# Allegro board fulladd.brd
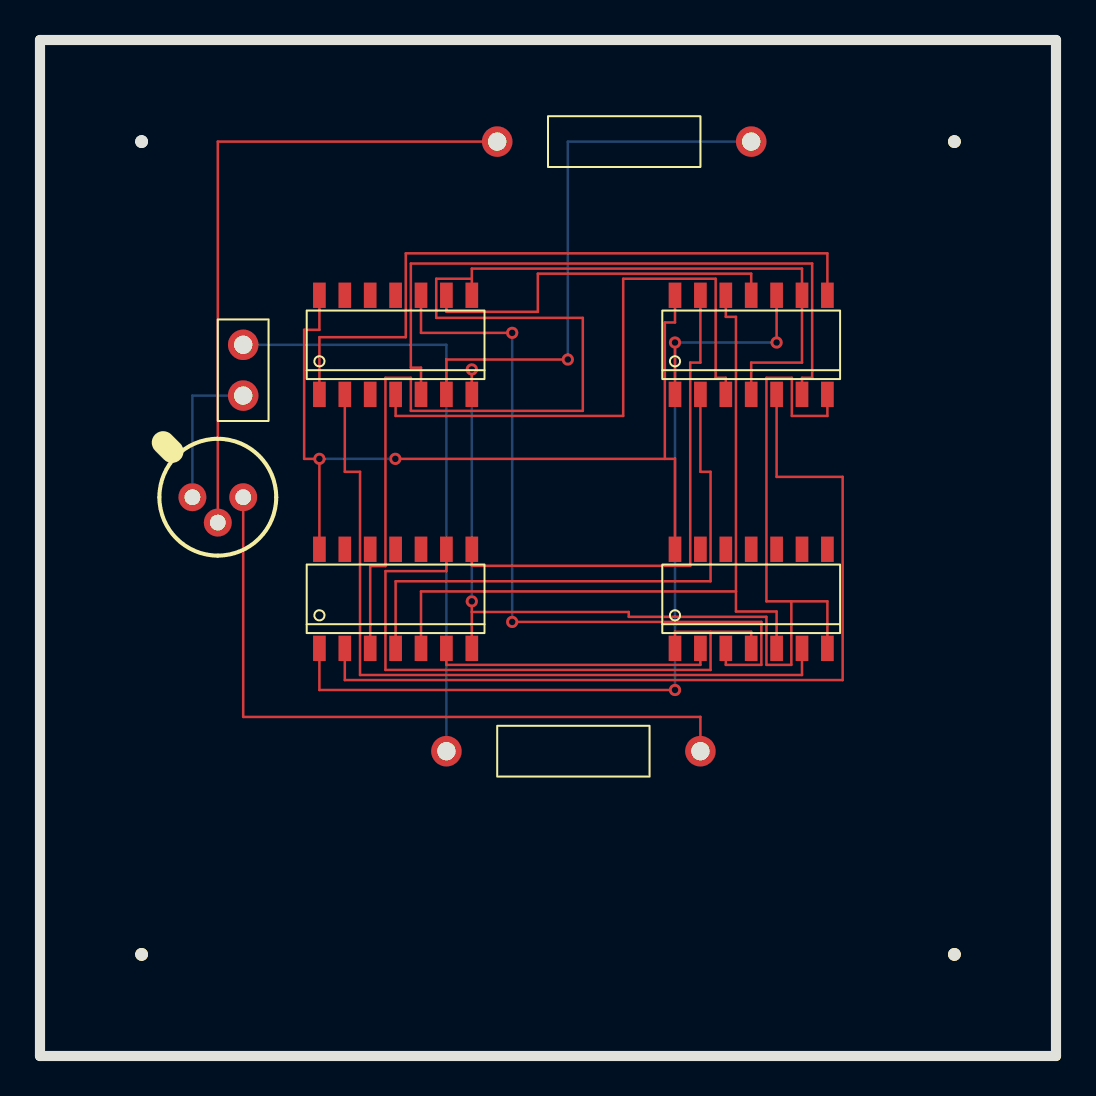
[diagram p0: board, top side]
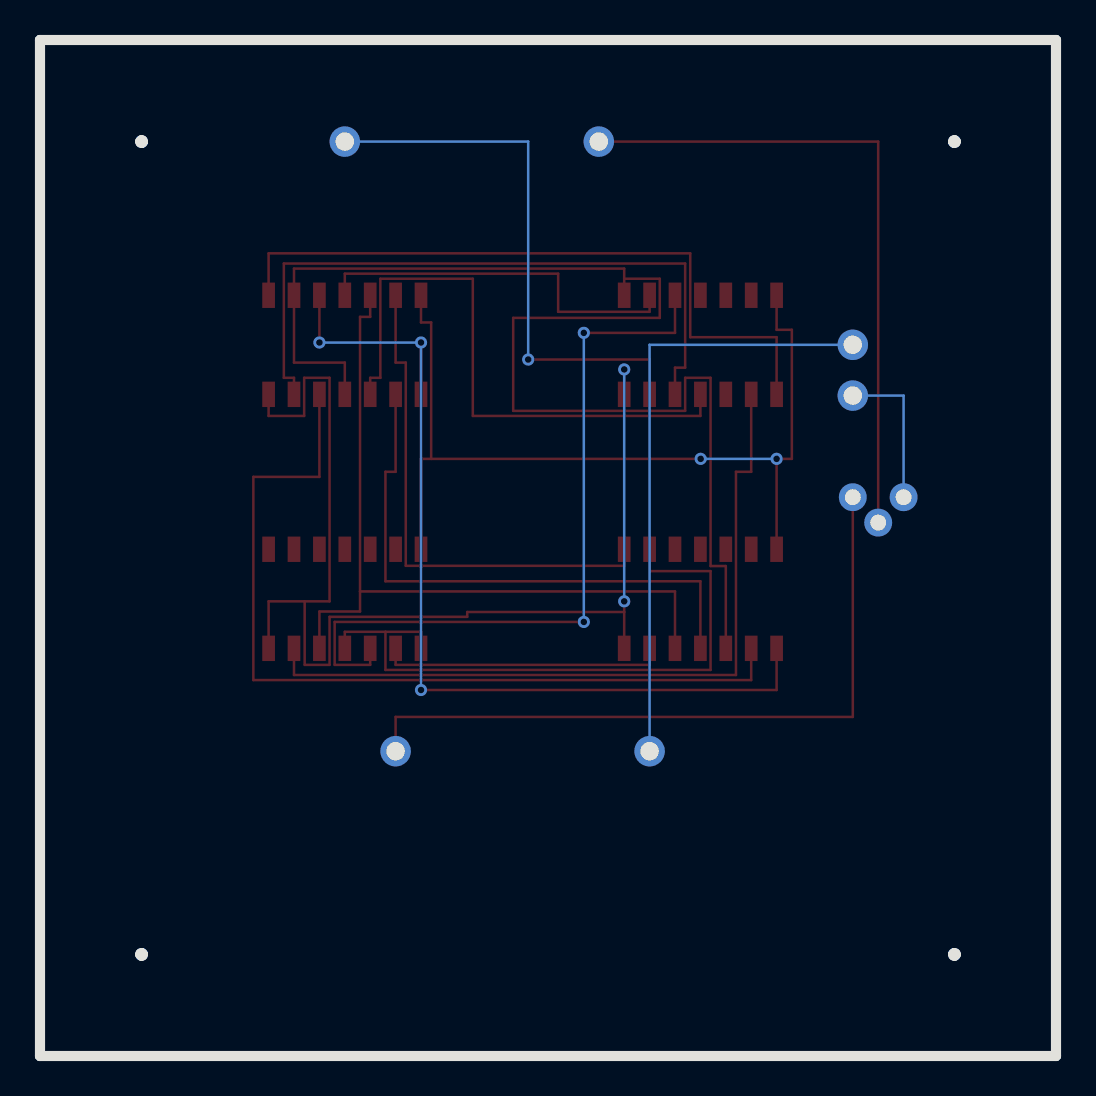
[diagram p1: board, bottom side, seen from below]

Outline 50.8 x 50.8 mm; copper layers: TOP, BOTTOM. Coordinates in mm from the lower left corner of the outline.
Outline path: 0,50.8 0,0 50.8,0 50.8,50.8 0,50.8

## Design rules (mm)
constraint set DEFAULT: min track width 0.127

## Placement (name value [footprint] x y rotation side)
J1  CON2  [JUMPER2]  10.16 35.56 270 top
NOREF  -  [unnamed]  5.08 5.08 0 top
NOREF#2  -  [unnamed]  45.72 45.72 0 top
NOREF#3  -  [unnamed]  5.08 45.72 0 top
NOREF#4  -  [unnamed]  45.72 5.08 0 top
Q1  Q2N2222  [TO18]  7.62 27.94 0 top
R1  1k  [RES500]  20.32 15.24 90 top
R2  10k  [RES500]  22.86 45.72 90 top
U1  7432  [SOIC14]  17.78 35.56 90 top
U2  7408  [SOIC14]  35.56 35.56 90 top
U3  7404  [SOIC14]  17.78 22.86 90 top
U4  7408  [SOIC14]  35.56 22.86 90 top

## Library data of the parts
J1 = CON2: User Part Number: ***
Q1 = Q2N2222
R1 R2 = R: Tolerance: ***; User Part Number: ***
U1 = 7432: Tolerance: ***; User Part Number: ***
U2 U4 = 7408: Tolerance: ***; User Part Number: ***
U3 = 7404: Tolerance: ***; User Part Number: ***

## Footprints (pads in the part's own frame, mm; a bottom-side part is the same pattern mirrored in y, then rotated)
JUMPER2
  round 1.524 hole 0.914: 1(0,0) 2(2.54,0)
RES500
  round 1.524 hole 0.914: 1(0,-12.7) 2(0,0)
SOIC14
  rect 1.27x0.635 smd: 1(-2.477,3.81) 2(-2.477,2.54) 3(-2.477,1.27) 4(-2.477,0) 5(-2.477,-1.27) 6(-2.477,-2.54) 7(-2.477,-3.81) 8(2.477,-3.81) 9(2.477,-2.54) 10(2.477,-1.27) 11(2.477,0) 12(2.477,1.27) 13(2.477,2.54) 14(2.477,3.81)
TO18
  round 1.397 hole 0.787: 1(0,0) 2(1.27,-1.27) 3(2.54,0)
unnamed
  round 0.635 hole 3.175 unplated: (0,0)

## Nets
GND: U1.7 U2.7 U3.7 U4.7
VCC: U1.14 U2.14 U3.14 U4.14
0: J1.2 Q1.1(E)
CARRY_OUT: U1.3
N00238_117: U1.9 U2.11(Y)
N00258_118: U1.10 U4.3
N00424_119: U2.13 U3.8
N00531_120: U3.6 U4.2
N00061: U2.1 U2.10 U3.1
N00071: U1.8 U2.4 U2.9 U3.3
N00103: U2.12 U3.5 U4.5
N00123: U3.9 U4.1 U4.4
N00134: R2.1 U1.6
N00238: U1.4 U2.3
N00258: U1.5 U2.6
N00424: U2.2 U3.4
N00507: U1.1 U2.8
N00531: U2.5 U3.2
N00564: U1.2 U4.6
N01248: Q1.2 R2.2
N01594: Q1.3 R1.1
N01630: J1.1 R1.2

Pads without a net: U1 11 12 13; U3 10 11 12 13; U4 8 9 10 11 12 13

## Via types
v1: diameter 0.61, hole 0.33, TOP to BOTTOM, 10 vias

## Routing (per net, layer and track width the routed paths; a pad name or vN(x,y) marks a point on that pad's centre or on a via; arc(x,y) is an arc through that point)
GND: length 59.6
  TOP w0.127: U2.7 39.37,32 37.59,32 37.59,33.91 36.32,33.91 36.32,22.73 37.57,22.73 ; 37.57,22.73 37.57,19.56 36.32,19.56 36.32,21.96 29.44,21.96 29.44,22.2 21.59,22.2 ; 37.57,22.73 39.37,22.73 U4.7 ; U3.7 21.59,22.2 ; 21.59,22.2 v1(21.59,22.73) ; U1.7 v1(21.59,34.33)
  BOTTOM w0.127: v1(21.59,34.33) v1(21.59,22.73)
VCC: length 45.2
  TOP w0.127: 31.24,29.86 31.75,29.86 U4.14 ; 31.24,29.86 31.24,36.68 31.75,36.68 U2.14 ; 31.24,29.86 v1(17.77,29.86) ; U3.14 v1(13.97,29.86) 13.21,29.86 13.21,36.31 13.97,36.31 U1.14
  BOTTOM w0.127: v1(17.77,29.86) v1(13.97,29.86)
0: length 7.6
  BOTTOM w0.127: Q1.1 7.62,33.02 J1.2
N00238_117: length 19.1
  TOP w0.127: U1.9 20.32,37.21 24.89,37.21 24.89,39.12 35.56,39.12 U2.11
N00258_118: length 38.1
  TOP w0.127: U1.10 19.05,36.16 v1(23.61,36.16) ; v1(23.61,21.7) 36.07,21.7 36.07,19.56 34.29,19.56 U4.3
  BOTTOM w0.127: v1(23.61,21.7) v1(23.61,36.16)
N00424_119: length 25.8
  TOP w0.127: U3.8 21.59,24.51 32.51,24.51 32.51,34.67 33.02,34.67 U2.13
N00531_120: length 14.4
  TOP w0.127: U3.6 20.32,19.56 33.02,19.56 U4.2
N00061: length 47.3
  TOP w0.127: U2.10 v1(36.83,35.67) ; v1(31.75,18.3) 13.97,18.3 U3.1 ; U2.1 v1(31.75,35.67)
  BOTTOM w0.127: v1(36.83,35.67) v1(31.75,35.67) v1(31.75,18.3)
N00071: length 68.2
  TOP w0.127: 21.59,38.86 19.81,38.86 19.81,36.91 27.14,36.91 27.14,32.26 18.54,32.26 18.54,33.91 17.27,33.91 17.27,24.5 16.51,24.5 U3.3 ; 21.59,38.86 21.59,39.37 38.1,39.37 U2.9 38.1,34.67 35.56,34.67 U2.4 ; 21.59,38.86 U1.8
N00103: length 38.8
  TOP w0.127: 34.8,23.23 34.8,36.96 34.29,36.96 U2.12 ; 34.8,23.23 19.05,23.23 U3.5 ; 34.8,23.23 34.8,22.22 36.83,22.22 U4.5
N00123: length 32.7
  TOP w0.127: 33.53,21.21 31.75,21.21 U4.1 ; 33.53,21.21 35.56,21.21 U4.4 ; 33.53,21.21 33.53,19.3 17.27,19.3 17.27,24.24 20.32,24.24 U3.9
N00134: length 27.9
  TOP w0.127: U1.6 20.32,34.82 v1(26.39,34.82)
  BOTTOM w0.127: R2.1 26.39,45.72 v1(26.39,34.82)
N00238: length 30.2
  TOP w0.127: U1.4 17.78,32 29.16,32 29.16,38.86 33.78,38.86 33.78,33.91 34.29,33.91 U2.3
N00258: length 34.2
  TOP w0.127: U1.5 19.05,34.42 18.54,34.42 18.54,39.62 38.61,39.62 38.61,33.91 38.1,33.91 U2.6
N00424: length 29
  TOP w0.127: U3.4 17.78,23.74 33.53,23.74 33.53,29.21 33.02,29.21 U2.2
N00507: length 34.5
  TOP w0.127: U2.8 39.37,40.13 18.29,40.13 18.29,35.94 13.97,35.94 U1.1
N00531: length 44.1
  TOP w0.127: U3.2 15.24,18.8 40.13,18.8 40.13,28.96 36.83,28.96 U2.5
N00564: length 38.2
  TOP w0.127: U1.2 15.24,29.21 16,29.21 16,19.05 38.1,19.05 U4.6
N01248: length 33
  TOP w0.127: Q1.2 8.89,45.72 R2.2
N01594: length 35.6
  TOP w0.127: Q1.3 10.16,16.95 33.02,16.95 R1.1
N01630: length 30.5
  BOTTOM w0.127: J1.1 20.32,35.56 R1.2
